# EAGLE board MSGP (EAGLE 7.2.0)
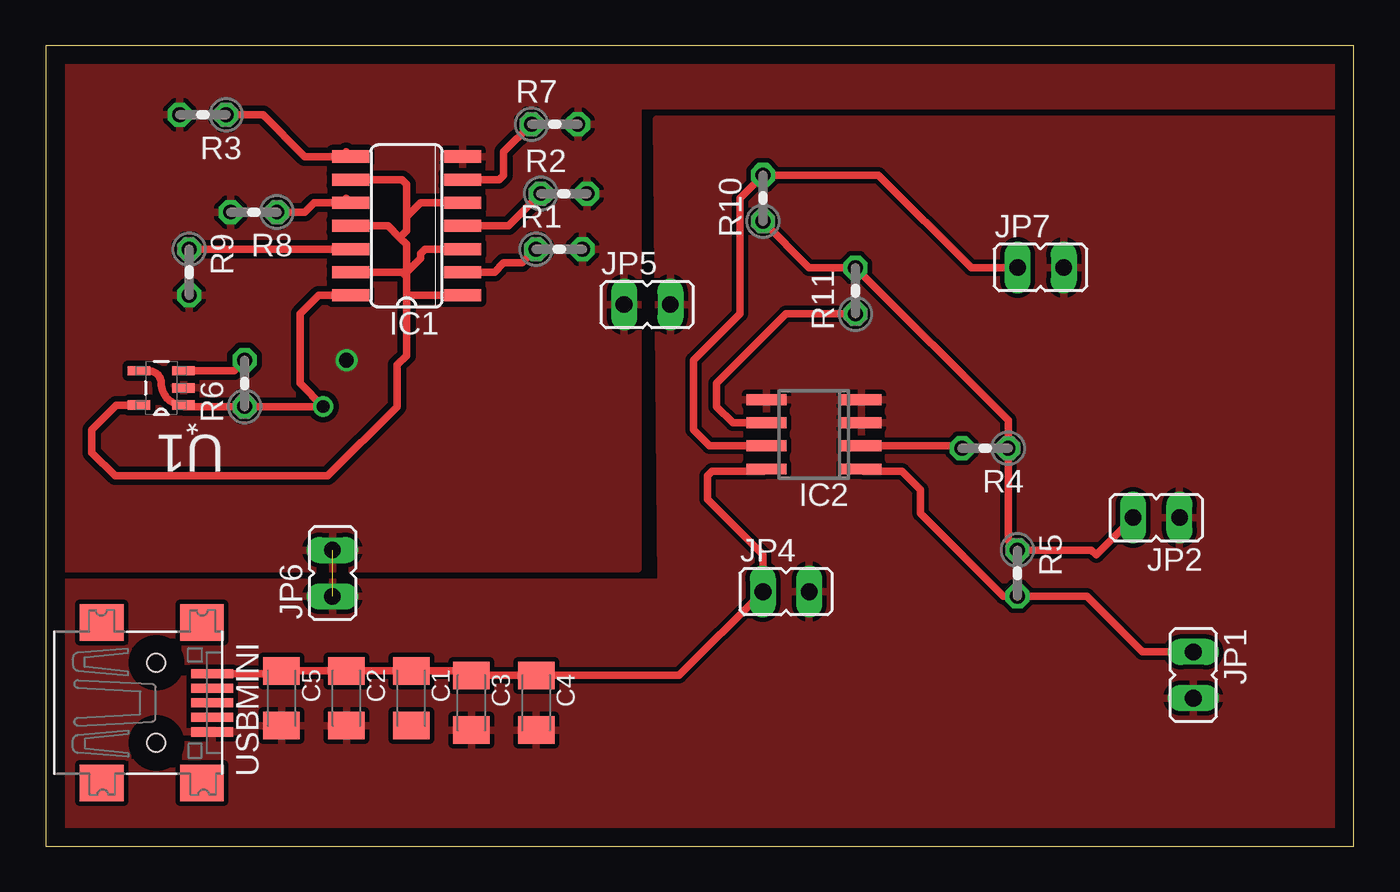
[diagram p0: board, top side]
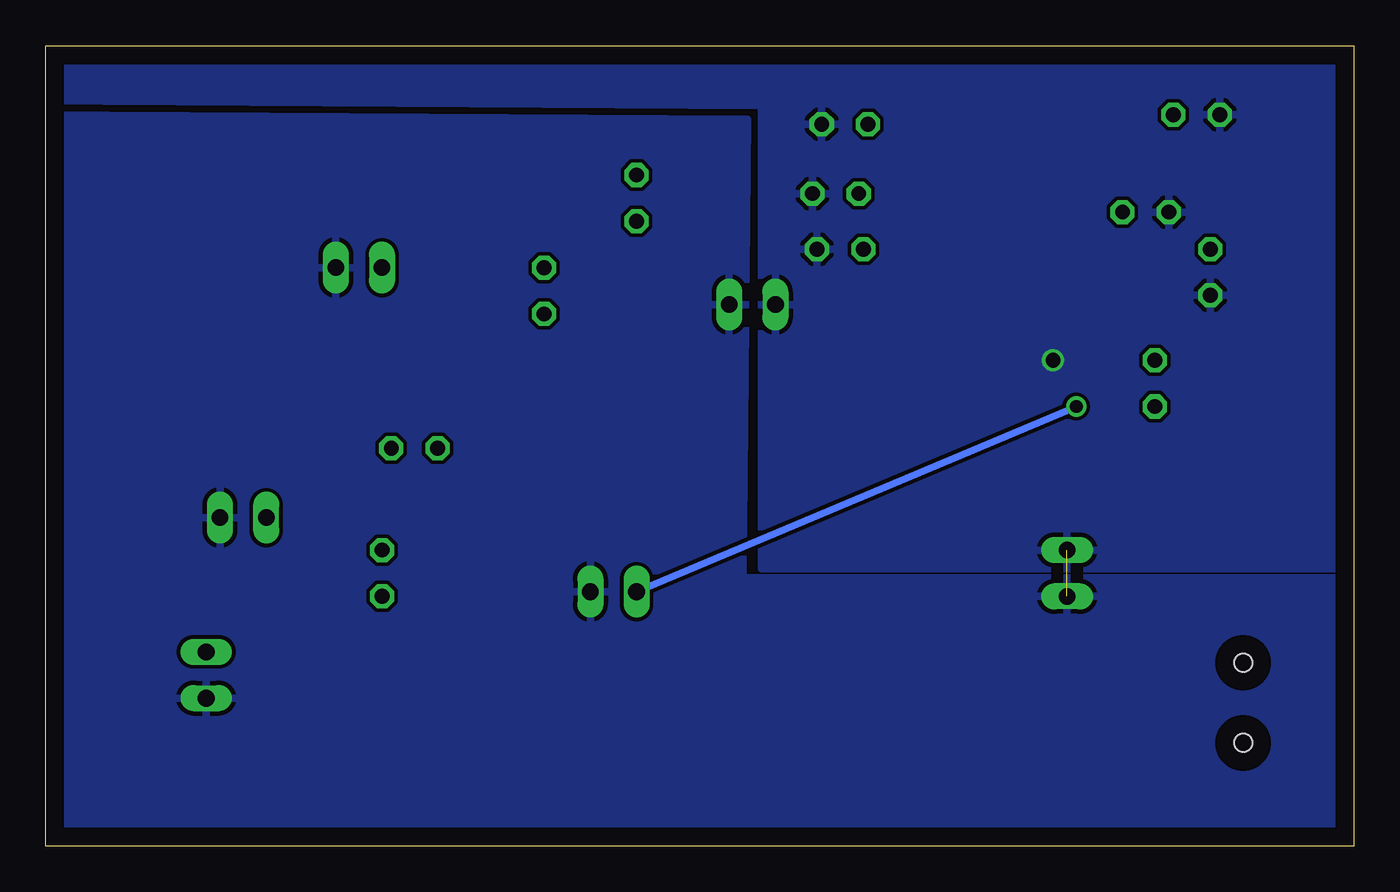
[diagram p1: board, bottom side, seen from below]

Size 71.81 x 43.93 mm. Coordinates in mm from the lower left corner, seen from the top.
Outline: 0,0 71.81,0 71.81,43.93 0,43.93 0,0
Copper layers (1*16): Top 0.035mm / dielectric 1.5mm / Bottom 0.035mm
Design rules "default": minimum track width 10mil, minimum drill 24mil, track to track 8mil, track to pad 8mil, pad to pad 8mil, via to via 8mil, smd to smd 8mil, copper to edge 40mil, drill to drill 8mil, minimum pad ring 10mil, minimum via ring 8mil, stop-mask expansion 4mil, vias tented up to drill 0mil, thermal gap 10mil

## Footprints (pad centres in the part's own frame; a part is rotated, then mirrored left to right if it is on the bottom)
C1206K = smd 1.5 x 2: 1 -1.5,0; 2 1.5,0
SO14 = smd 0.66 x 2.032: 1 -3.81,-3.073; 2 -2.54,-3.073; 3 -1.27,-3.073; 4 0,-3.073; 5 1.27,-3.073; 6 2.54,-3.073; 7 3.81,-3.073; 8 3.81,3.073; 9 2.54,3.073; 10 1.27,3.073; 11 0,3.073; 12 -1.27,3.073; 13 -2.54,3.073; 14 -3.81,3.073
SO08 = smd 0.6 x 2.2: 1 -1.905,-2.6; 2 -0.635,-2.6; 3 0.635,-2.6; 4 1.905,-2.6; 5 1.905,2.6; 6 0.635,2.6; 7 -0.635,2.6; 8 -1.905,2.6
JP1 = drill 0.914 long: 1 0,-1.27; 2 0,1.27
0204V = drill 0.813 octagon: 1 -1.27,0; 2 1.27,0
SOT95P280X100-5N = smd 1.219 x 0.508: 1 -1.219,0.94; 2 -1.219,0; 3 -1.219,-0.94; 4 1.219,-0.94; 5 1.219,0.94
USB-MINIB = smd 0.5 x 2.308: D+ 0,4.064; D- -0.8,4.064; GND 1.6,4.064; ID 0.8,4.064; VBUS -1.6,4.064 | smd 2 x 2.4: GND1 -4.4,-2; GND2 -4.4,3.5; GND3 4.4,3.5; GND4 4.4,-2 | hole 1: -2.2,1; 2.2,1

## Placement (x,y rotation side)
C1  100uF  [C1206K]  20.07,8.13 270 top
C2  10uF  [C1206K]  16.51,8.13 270 top
C3  100uF  [C1206K]  23.37,7.87 270 top
C4  100uF  [C1206K]  26.92,7.87 270 top
C5  0.1uF  [C1206K]  12.95,8.13 270 top
IC1  74ALS04D  [SO14]  19.81,34.04 90 top
IC2  NE5532D  [SO08]  42.16,22.61 90 top
JP1  [JP1]  62.99,9.4 180 top
JP2  [JP1]  60.96,18.03 90 top
JP4  [JP1]  40.64,13.97 270 top
JP5  [JP1]  33.02,29.72 270 top
JP6  [JP1]  15.75,14.99 0 top
JP7  [JP1]  54.61,31.75 270 top
R1  [0204V]  28.19,32.77 0 top
R2  [0204V]  28.45,35.81 0 top
R3  [0204V]  8.64,40.13 180 top
R4  [0204V]  51.56,21.84 180 top
R5  [0204V]  53.34,14.99 270 top
R6  [0204V]  10.92,25.4 90 top
R7  [0204V]  27.94,39.62 0 top
R8  [0204V]  11.43,34.8 180 top
R9  [0204V]  7.87,31.5 270 top
R10  [0204V]  39.37,35.56 90 top
R11  [0204V]  44.45,30.48 90 top
U1  LTC6905CS5TRMPBF  [SOT95P280X100-5N]  6.35,25.15 180 top
USBMINI  [USB-MINIB]  5.08,7.87 270 top

## Library data of the parts
C1-C5 USBMINI = adafruit
IC1 = 74xx-us
IC2 = linear
JP1 JP2 JP4-JP7 = jumper
R1-R11 = resistor
U1 = LTC_By_element14_Batch_1; MPN: LTC6905CS5#TRMPBF; OC_FARNELL: 1663923; OC_NEWARK: 19P0750; PACKAGE: SOT-23-5; SUPPLIER: Linear Technology

## Nets
GND: C2.2 C3.2 C4.2 C5.2 IC1.7 IC2.3 IC2.4 IC2.5 JP1.2 JP2.1 JP4.2 JP5.1 JP5.2 JP6.1 JP6.2 JP7.2 R1.2 R2.2 R3.2 R7.2 R8.2 R9.2 U1.2 USBMINI.GND
N$1: IC1.1 IC1.3 IC1.5 IC1.9 IC1.11 IC1.13 U1.5
N$2: JP2.2 R4.1 R5.1 R10.1 R11.2
N$3: IC2.1 JP1.1 R5.2
N$4: IC1.10 R8.1
N$5: IC2.2 R4.2
N$6: R6.2 U1.3
N$7: IC1.2 R1.1
N$8: IC1.4 R2.1
N$9: IC1.8 R3.1
N$10: IC1.6 R7.1
N$11: IC1.12 R9.1
N$12: IC2.7 JP7.1 R10.2
N$13: IC2.6 R11.1
VCC: C1.1 C2.1 C3.1 C4.1 C5.1 IC1.14 IC2.8 JP4.1 R6.1 U1.1 U1.4 USBMINI.VBUS

## Tracks (layer width: path | path; a pad name or v marks a point on that pad's centre or on a via)
GND  (via drill 0.8)  (1 unrouted)
  other vias: 16.51,26.67
  pour Top (isolate 0.305): 1.02,82.8 98.04,82.8 98.04,40.64 32.51,40.64 32.51,15.24 1.02,15.24
  pour Top (isolate 0.254): 1.02,14.48 33.78,14.48 33.53,39.88 73.41,39.88 72.9,0.51 1.02,0.76
  pour Bottom: -1.02,14.73 -0.76,-1.02 73.66,-0.25 73.66,2.03 72.64,40.13 33.27,39.88 33.53,14.73
  pour Bottom: -1.02,15.24 -0.76,44.2 72.64,44.7 72.64,40.89 32.51,40.64 32.51,15.24
N$1
  Top 0.406: IC1.11 18.8,34.04 19.43,33.4 | 19.43,33.4 19.81,33.02 19.81,31.5 | 19.81,31.5 19.81,31.24 | 19.81,31.24 19.81,30.23 | 19.81,30.23 19.81,26.92 19.3,26.42 19.3,24.13 15.49,20.32 3.81,20.32 2.54,21.59 2.54,22.86 3.89,24.21 U1.5 | IC1.3 20.83,32.77 20.57,32.51 20.57,32.26 19.81,31.5 | IC1.9 19.56,36.58 19.81,36.32 19.81,34.54 | 19.81,34.54 19.81,33.78 19.43,33.4 | IC1.13 19.56,31.5 19.81,31.24 | IC1.5 20.57,35.31 19.81,34.54 | IC1.1 19.81,30.23
N$2
  Top 0.406: JP2.2 57.66,16 57.4,16.26 R5.1 52.83,16.76 R4.1 52.83,23.37 R11.2 41.91,31.75 R10.1
N$3
  Top 0.406: IC2.1 44.89,20.57 46.99,20.57 48.01,19.56 48.01,18.29 52.58,13.72 R5.2 57.15,13.72 60.2,10.67 JP1.1
N$4
  Top 0.406: 16.48,35.56 IC1.10 14.73,35.31 14.22,34.8 R8.1
N$5
  Top 0.406: IC2.2 50.16,21.97 R4.2
N$6
  Top 0.406: U1.3 10.34,26.09 R6.2
N$7
  Top 0.406: IC1.2 24.64,31.5 25.15,32 26.16,32 R1.1
N$8
  Top 0.406: IC1.4 25.4,34.04 R2.1
N$9
  Top 0.406: 16.48,38.1 IC1.8 14.22,37.85 11.94,40.13 R3.1
N$10
  Top 0.406: IC1.6 24.89,36.58 25.15,36.83 25.15,38.1 R7.1
N$11
  Top 0.406: R9.1 IC1.12
N$12
  Top 0.406: IC2.7 36.45,21.97 35.56,22.86 35.56,26.67 38.1,29.21 38.1,35.56 R10.2 45.72,36.83 50.8,31.75 JP7.1
N$13
  Top 0.406: IC2.6 37.72,23.24 36.83,24.13 36.83,25.4 40.64,29.21 R11.1
VCC  (via drill 0.7)
  Top 0.406: IC2.8 39.44,20.57 36.58,20.57 36.32,20.32 36.32,19.05 39.37,16 JP4.1 34.77,9.37 C4.1 C3.1 23.37,9.63 C1.1 C2.1 C5.1 12.95,9.47 USBMINI.VBUS | U1.4 5.66,26.09 arc-90 6.35,25.4 arc90 7.54,24.21 U1.1 7.64,24.13 R6.1 v15.24,24.13 13.97,25.4 13.97,29.21 14.99,30.23 IC1.14
  Bottom 0.406: v15.24,24.13 JP4.1